# Altium PCB OptocouplerV2shop.PcbDoc
Units mil, origin at the board's own origin, x right, y up, seen from the top; angles counter-clockwise.
Board outline 1685 x 1280 mil, 2 copper layers (Top Layer, Bottom Layer); 10 components, 11 nets, 42 pads, 0 vias.
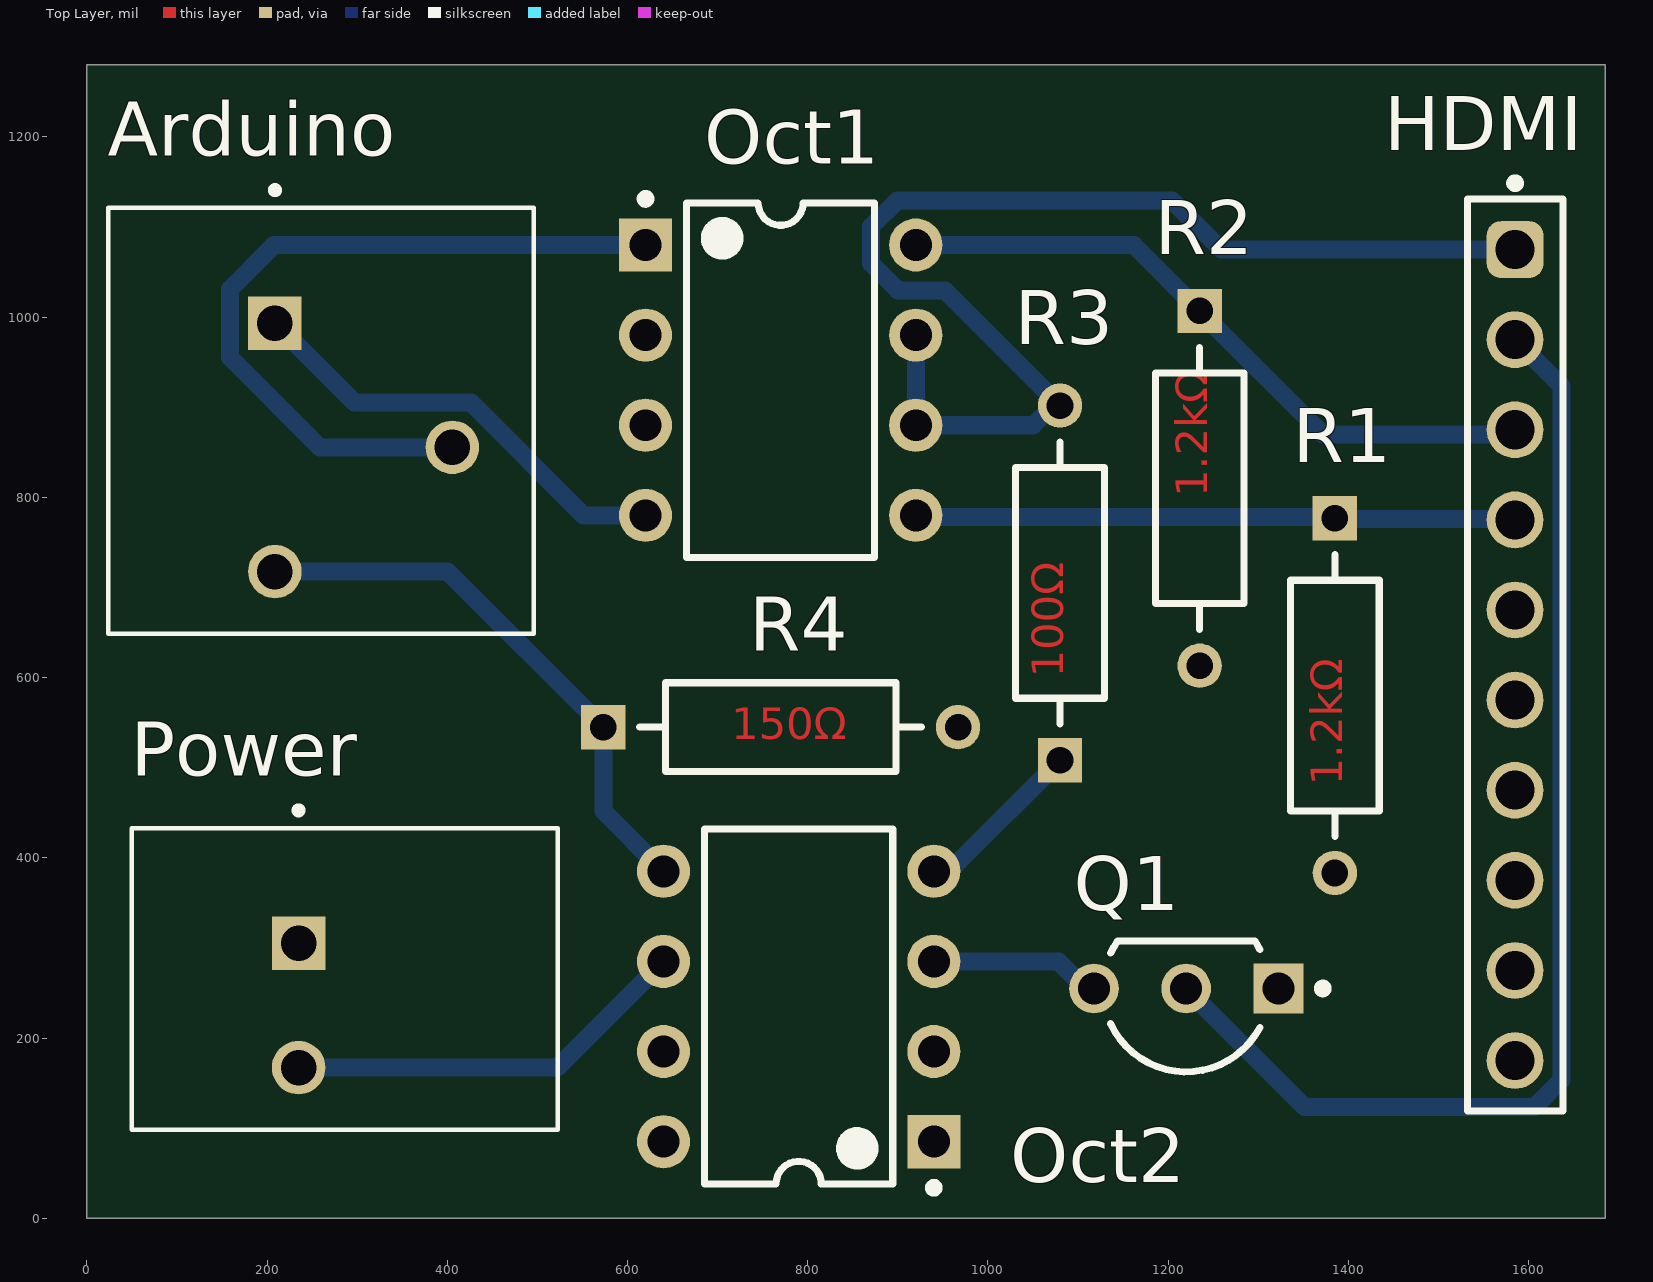
[diagram p0: Top Layer view]
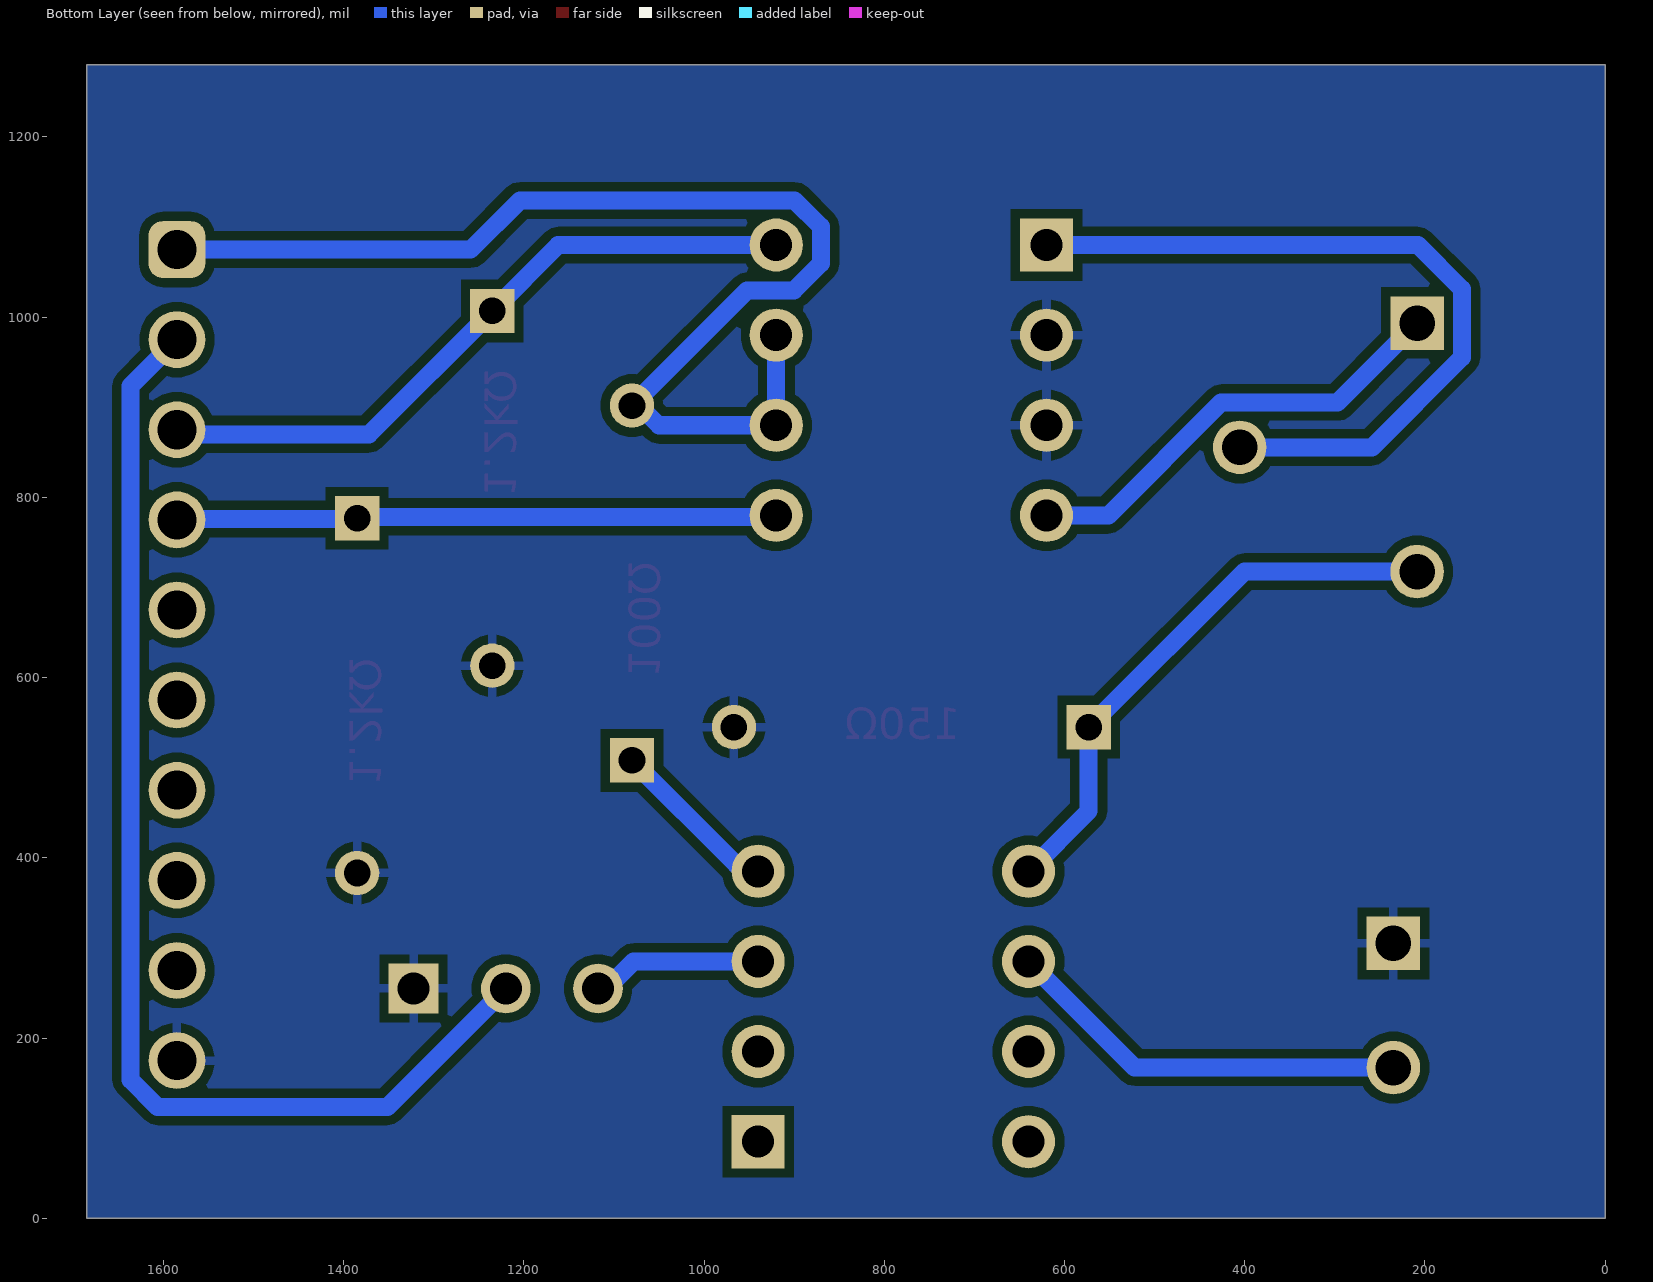
[diagram p1: Bottom Layer view, seen from below]
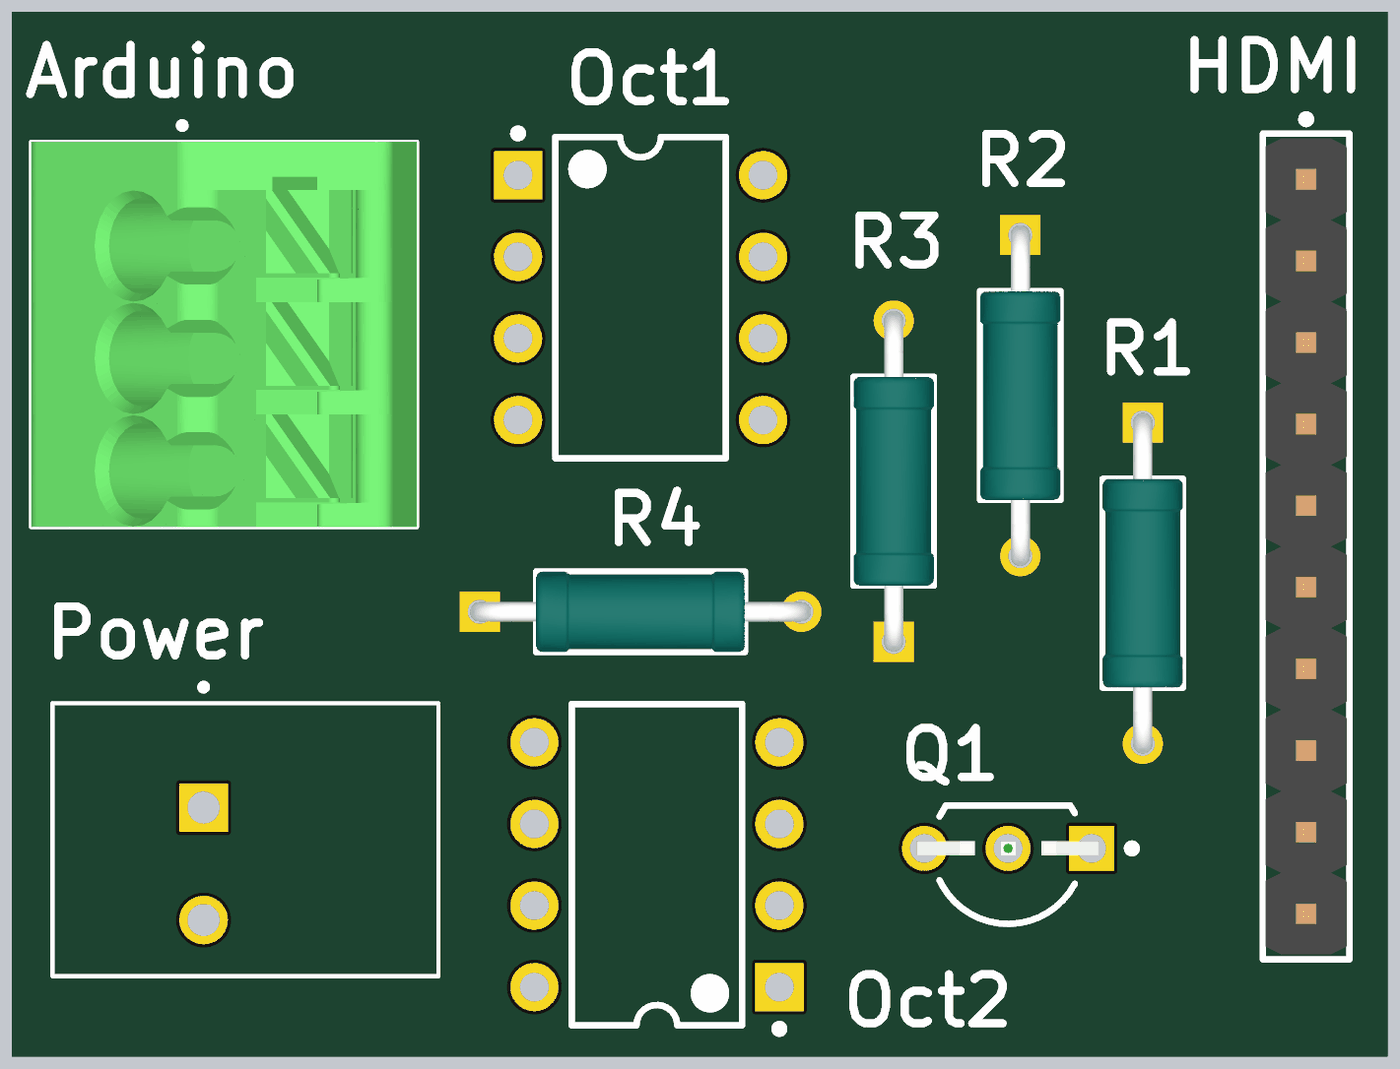
[diagram p2: 3D render of the assembled board from above, using the file's embedded part models]

## Layer stack, top to bottom
Top Solder: solder mask 0.4, Solder Resist, Dk 3.5
Top Layer: signal copper 1.4
Dielectric 1: dielectric 12.6, FR-4, Dk 4.8
Bottom Layer: signal copper 1.4
Bottom Solder: solder mask 0.4, Solder Resist, Dk 3.5

## Board outline
0,0 1685,0 1685,1280 0,1280

## Design rules (kind name [scope] priority, off if disabled: settings)
Clearance [All] p1: gap=10 ignorepadtopadclearanceinfootprint=FALSE
PolygonConnect [All] p1: connectstyle=Relief reliefconductorwidth=10 reliefentries=4 polygonreliefangle="90 Angle" airgapwidth=10
RoutingVias [All] p1: holewidth=28 width=50 viastyle="Through Hole" minholewidth=28 minwidth=50 maxholewidth=28 maxwidth=50
SolderMaskExpansion [All] p1: expansion=4 istentingtop=FALSE
Width [All] p1: maxlimit=40 minlimit=10 preferedwidth=20 minimp=50.000000 maximp=50.000000 favimp=50.000000
30 further rules are at their usual default settings.

## Classes and differential pairs
component class OptocouplerV2: HDMI Oct1 Oct2 R1 R2 R3

## Components (designator, comment, footprint, x,y, rotation, side; value= is the part's Value field where it differs from the comment)
Arduino "1985205" TE_1985205 260,885 r270 top
HDMI "61301011121" 61301011121 1585,625 r270 top
Oct1 "" VISH-DIP8 770,930 r0 top
Oct2 "" VISH-DIP8 790,235 r180 top
Power "1984963" PHOENIX_1984963 49.96,432.95 r270 top
Q1 "" ONSC-TO-92-3-29-11_AM_BL 1220,255 r180 top
R1 "" FP-MRS25-MFG 1385,580 r270 top
R2 "" FP-MRS25-MFG 1235,810 r270 top
R3 "" FP-MRS25-MFG 1080,705 r90 top
R4 "" FP-MRS25-MFG 770,545 r0 top

## Footprints (in the part's own frame and the unit in brackets; to place one, negate y for a bottom-side part, rotate by r counter-clockwise, add the part's x,y. Pads: shape width x height; smd on the part's side, far side on the other; paste and mask are expansions set on the pad)
61301011121 [mm] "Pin Header, pitch 2.54 mm, THT, Vertical, single row, 10p"
  rrect50% 1.6x1.6 hole 1.1: 1(-11.43,0)
  round 1.6 hole 1.1: 2(-8.89,0) 3(-6.35,0) 4(-3.81,0) 5(-1.27,0) 6(1.27,0) 7(3.81,0) 8(6.35,0) 9(8.89,0) 10(11.43,0)
  silkscreen extent -13.42,-1.35 12.85,1.35, body extent -12.7,-1.27 12.7,1.27, height 8.57
FP-MRS25-MFG [mm]
  rect 1.25x1.25 hole 0.75 paste-2539.97 mask+0: 1(-5,0)
  round 1.25 hole 0.75 paste-2539.97 mask+0: 2(5,0)
  silkscreen extent -3.98,-1.25 3.98,1.25, body extent -5.72,-1.35 5.72,1.35, height 0.25
ONSC-TO-92-3-29-11_AM_BL [mm] "TO, 3-Leads, Body Dia 4.7mm, Pitch 2.6mm"
  rect 1.4x1.4 hole 0.9: 1(-2.6,0)
  round 1.4 hole 0.9: 2(0,0) 3(2.6,0)
  silkscreen extent -3.98,-1.34 2.13,2.35, body extent -2.84,-1.34 2.84,2.35, height 5.33
PHOENIX_1984963 [mm]
  rect 1.508x1.508 / inner round 1.508 / far side rect 1.508x1.508 hole 1: 1(3.25,4.7)
  round 1.508 hole 1: 2(6.75,4.7)
  silkscreen extent -0.6,0 8.5,12
TE_1985205 [mm]
  rect 1.508x1.508 / inner round 1.508 / far side rect 1.508x1.508 hole 1: 1(-2.75,-1.3)
  round 1.508 hole 1: 2(0.75,3.7) 3(4.25,-1.3)
  silkscreen extent -6.6,-6 6,6, body extent -6,-6 6,6, height 13.1
VISH-DIP8 [mm] "DIP, 8-Leads, Body 9.9x6.8mm, Pitch 2.54mm"
  rect 1.5x1.5 hole 0.9: 1(-3.81,3.81)
  round 1.5 hole 0.9: 2(-3.81,1.27) 3(-3.81,-1.27) 4(-3.81,-3.81) 5(3.81,-3.81) 6(3.81,-1.27) 7(3.81,1.27) 8(3.81,3.81)
  silkscreen extent -3.93,-5 2.65,5.23, body extent -3.95,-4.95 3.95,4.95, height 4.58

## Part data
Arduino: library part CMP-003-000000-1, "PCB Terminal Push-In 3.5mm 16AWG 400V 8A 3 Position COMBICON PTSA Series", Package=None, Check_prices=https://www.snapeda.com/parts/1985205/Phoenix+Contact/view-part/?ref=eda, Component Type=Standard, Design Item ID=1985205, MF="Phoenix Contact", MP=1985205, Pin Count=3, SnapEDA_Link=https://www.snapeda.com/parts/1985205/Phoenix+Contact/view-part/?ref=snap, Source=1985205.SchLib
HDMI: library part CMP-1502-01082-5, Color=Black, Contact Resistance=20mΩ, Current Rating=3A, Flammability Rating="UL94 V-0", Insulation Resistance=1GΩ, Max Operating Temperature=105°C, Min Operating Temperature=-40°C, Operating Supply Voltage=250V, Connector Type="Male Pin", Contact Gender=Male, Contact Material=Copper, Contact Mating Length=5.9944mm, Contact Plating=Gold, Gender=Male, Height=8.74mm, Housing Material=PBT, Lead Pitch=2.54mm, Length=2.54mm, Mount="Through Hole", NexarPartId=18818159, Number of Contacts=10, Number of Pins=10, Number of Positions=10, Number of Rows=1, Orientation=Vertical, Packaging=Bulk, Pitch=2.54mm, REACH SVHC=Unknown, RoHS=Compliant, Termination=Solder, Voltage Rating=250V, Width=25.4mm
Oct1 Oct2: library part CMP-1666-00026-1, "Optocoupler, Phototransistor Output, Dual Channel, 1.3 V, -55 to 100 degC, 8-Pin DIP, RoHS, Tube", Case\Package=Axial, Max Operating Temperature="155 degC", Min Operating Temperature="-55 degC", Package Quantity=200, Power Rating="250 mW", Resistance="22.1 Ohm", Tolerance=1%, Voltage Rating="250 V", ComponentLink1Description="Manufacturer URL", ComponentLink1URL=http://www.vishay.com/, ComponentLink2Description=Datasheet, ComponentLink2URL=http://www.vishay.com/docs/83640/ild74.pdf, ComponentLink3Description="Package Specification", ComponentLink3URL=http://www.vishay.com/docs/83241/83241.pdf, DatasheetVersion="Rev. 1.7, 05/2011", Length="0.248 inch", Mount="Through Hole", PackageDescription="8-Pin Double In-line Package, Body 9.77 x 6.645 mm, Pitch 2.54 mm", PackageReference=DIP8, PackageVersion="Rev. 1.1, 12/2003", Packaging=Bulk, RoHSCompliant=true
Power: library part CMP-005-000000-1, Package=None, Availability=Unavailable, Component Type=Standard, Design Item ID=1984963, MP=1984963, Pin Count=2, Price=None, Source=1984963.SchLib
Q1: library part CMP-1058-00942-1, "Small Signal MOSFET, 200 mA, 60 V, N-Channel, 3-Pin TO-92, Pb-Free, Tape and Reel", Manufacturer="On Semiconductor", Package Type=TO-92, PartNumber=2N7000RLRAG, Channel Polarity="N Channel", Ciss Typ (pF)=60, ComponentLink1Description="Manufacturer URL", ComponentLink1URL=http://www.onsemi.com/, ComponentLink2Description=Datasheet, ComponentLink2URL=http://www.onsemi.com/pub_link/Collateral/2N7000-D.PDF, ComponentLink3Description="Package Specification", ComponentLink3URL=http://www.onsemi.com/pub_link/Collateral/MAC97-D.PDF, Configuration=Single, Coss Typ (pF)=25, Crss Typ (pF)=5, DatasheetVersion="Rev. 8", ID Max (A)=0.2, Mounting Technology="Through Hole", PackageDescription="3-Pin Transistor Outline, Body 4.825 x 3.685 mm, Pitch 1.27 mm", PackageReference=TO-92-3-29-11_AM_BL, PackageVersion="Rev. AM", Packing="Tape and Reel", PD Max (W)=0.35, RoHS=Pb-Free, V(BR)DSS Min (V)=60, VGS Max (V)=20, VGS(th) Max (V)=3
R1 R2 R3 R4: library part CMP-00030-42757237-1, "MRS25000C1000FRP00 Resistor, 100 Ohm, ± 1%, 600 mW, Axial Leaded, Metal Film (Thin Film), Professional", Case/Package=Axial, Max Operating Temperature=155°C, Max Power Dissipation=600mW, Min Operating Temperature=-55°C, Resistance=100Ω, Temperature Coefficient=50ppm/°C, Tolerance=1%, Voltage Rating=350V, Composition="Metal Film, Thin Film", Contact Plating=Tin, Diameter=2.5mm, Lead Diameter=600µm, Lead Free="Lead Free", Length=6.5mm, Military Standard=Not, Mount="Through Hole", NexarPartId=42757237, Number of Pins=2, Number of Terminations=2, Packaging="Tape & Reel (TR)", Power Rating=600mW, Radiation Hardening=No, REACH SVHC=Unknown, RoHS=Compliant, Schedule B="8533210090, 8533210090", Termination=Axial, Voltage Rating (DC)=350V, Width=2.5mm

## Nets (pads, with @x,y where several pads share a name; then routed paths per layer and width w, separated by ;. In a path a pad name is that pad's centre, name@x,y a point inside that pad or via, vN(x,y) a via of type N, cw(c..) or ccw(c..) an arc to the next point about the centre after c; other vN are vias at no path point)
5V_In: Oct2.6 Power.2 | length 453.8
  Bottom Layer w20: Power.2 522.2,167.2 Oct2.6
GND: HDMI.10 Oct1.2 Oct1.3 Power.1 Q1.1 R1.2 R2.2 R4.2
NetArduino_1: Arduino.1 Oct1.4 | length 499.5
  Bottom Layer w20: Arduino.1 296.93,905.16 426.25,905.16 551.41,780 Oct1.4
NetArduino_2: Arduino.2 Oct1.1 | length 855.1
  Bottom Layer w20: Arduino.2@405.67,865.67 Arduino.2 258.96,855.47 159.13,955.3 159.13,1031.24 207.9,1080 Oct1.1
NetArduino_3: Arduino.3 Oct2.5 R4.1 | length 623.5
  Bottom Layer w20: Arduino.3 400.47,717.68 R4.1 573.15,451.85 Oct2.5
NetHDMI_1: HDMI.1 Oct1.6 Oct1.7 R3.2 | length 1316.4
  Bottom Layer w20: Oct1.7 Oct1.6 1050.24,880 R3.2@1065.24,895 ; R3.2 952.32,1029.53 900.43,1029.53 870.47,1059.49 870.47,1100.51 899.48,1129.53 1204.45,1129.53 1258.98,1075 HDMI.1
NetHDMI_2: HDMI.2 Q1.2 | length 1326.1
  Bottom Layer w20: Q1.2 1351.5,123.5 1606.33,123.5 1636.5,153.67 1636.5,923.5 HDMI.2
NetHDMI_3: HDMI.3 Oct1.8 R2.1 | length 754.1
  Bottom Layer w20: Oct1.8 1161.85,1080 R2.1 1371.85,870 1580,870 HDMI.3
NetHDMI_4: HDMI.4 Oct1.5 R1.1 | length 676.4
  Top Layer w20: Oct1.5 Oct1.5@921.57,778.43 ; R1.1@1383.43,778.43 R1.1 R1.1@1388.43,773.43
  Bottom Layer w20: Oct1.5 921.57,778.43 1383.43,778.43 R1.1 1385.93,775.93 1584.07,775.93 HDMI.4
NetOct2_3: Oct2.3 Q1.3 | length 199.6
  Top Layer w20: Q1.3@1108.13,255 Q1.3
  Bottom Layer w20: Oct2.3 1078.13,285 1108.13,255 Q1.3
NetOct2_4: Oct2.4 R3.1 | length 191
  Bottom Layer w20: Oct2.4 947.47,392.47 964.32,392.47 R3.1
pads on no net: HDMI.5 HDMI.6 HDMI.7 HDMI.8 HDMI.9 Oct2.1 Oct2.2 Oct2.7 Oct2.8

## Polygon pours and split planes (outlines as drawn)
GND on Bottom Layer "GND_L02_P003" (solid, pour order 3): 0,0 0,1280 1685,1280 1685,0

## Other copper
Top Layer:
  text "1.2kΩ" at 1255,800 h60 r90
  text "100Ω" at 1095,600 h60 r90
  text "150Ω" at 715,520 h60
  text "1.2kΩ" at 1405,480 h60 r90